# EAGLE board stm32hw05 (EAGLE 6.6.0)
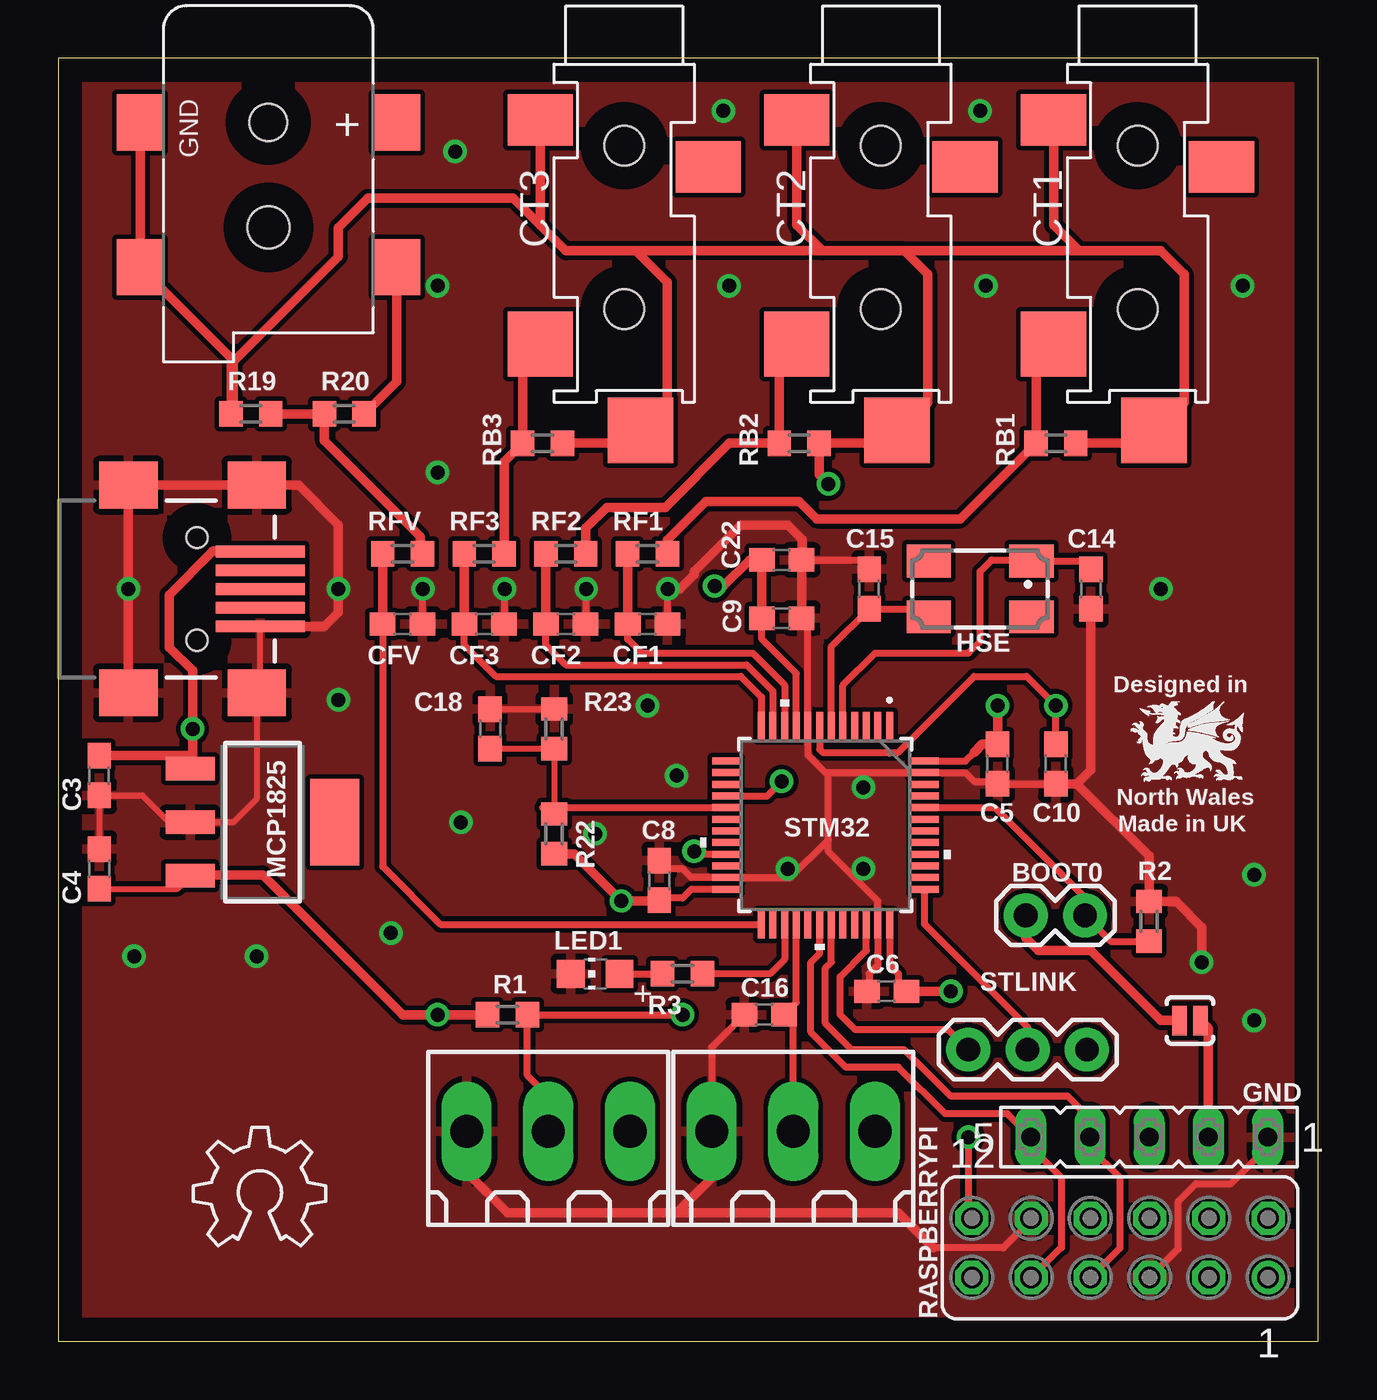
[diagram p0: board, top side]
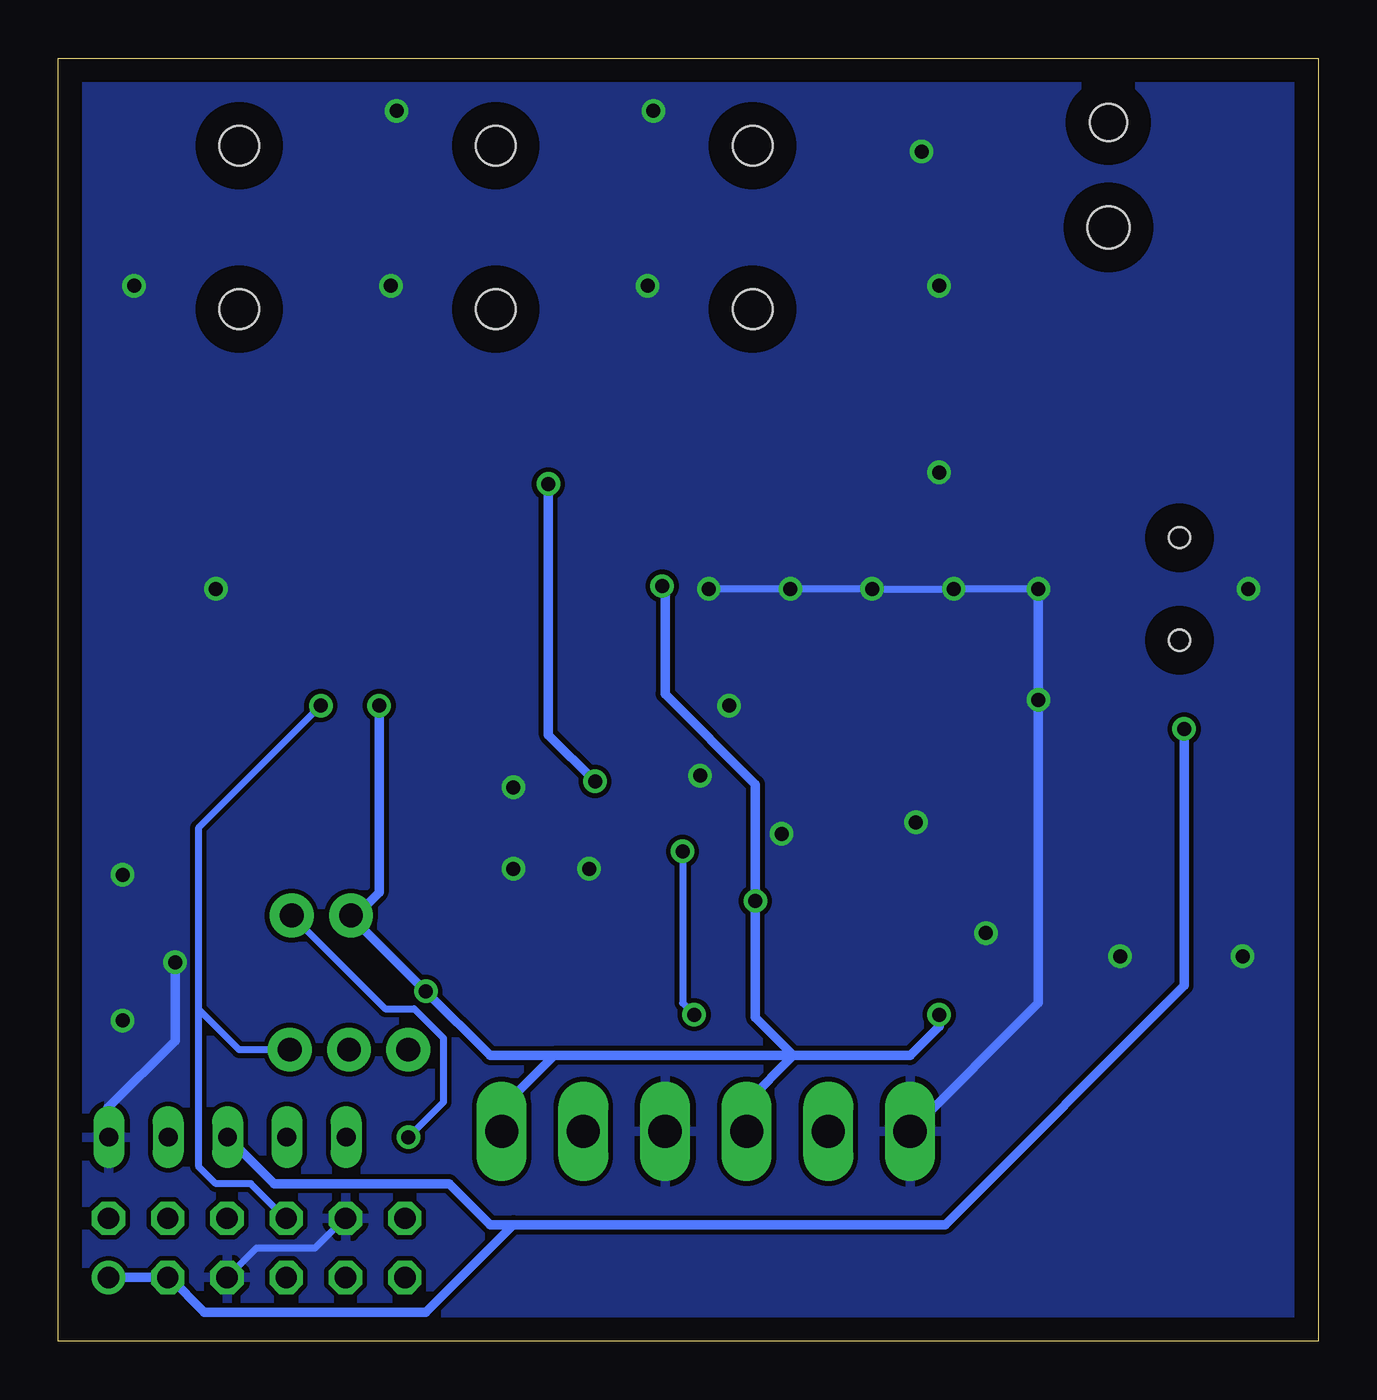
[diagram p1: board, bottom side, seen from below]

Size 54 x 55 mm. Coordinates in mm from the lower left corner, seen from the top.
Outline: 0,0 54,0 54,55 0,55 0,0
Copper layers (1*16): Top 0.035mm / dielectric 1.5mm / Bottom 0.035mm
Design rules "default *": minimum track width 10mil, minimum drill 24mil, track to track 8mil, track to pad 8mil, pad to pad 8mil, via to via 8mil, smd to smd 8mil, copper to edge 40mil, drill to drill 8mil, minimum pad ring 10mil, minimum via ring 8mil, stop-mask expansion 4mil, vias tented up to drill 0.6mm, thermal gap 10mil
Net classes: 0 default: width 0.203 mm, drill 0.6 mm, clearance 0.203 mm; 1 power: width 0.381 mm, drill 0.6 mm, clearance 0.254 mm; 2 gnd: width 0.254 mm, drill 0.6 mm, clearance 0.254 mm

## Footprints (pad centres in the part's own frame; a part is rotated, then mirrored left to right if it is on the bottom)
1X02 = drill 1.016 pad 1.88: 1 0,0; 2 2.54,0
C0603 = smd 1.1 x 1: 1 -0.85,0; 2 0.85,0
STEREO_SMT = smd 2.8 x 2.2: P$1 -3.6,-2.4; P$3 3.6,-4.4 | smd 2.8 x 2.8: P$2 -3.6,-12; P$4 0.7,-15.7 | hole 1.7: 0,-3.5; 0,-10.5
180-3 = drill 1.422 long: 1 -3.5,0; 2 0,0; 3 3.5,0
FE05-1 = drill 0.813 long: 1 -5.08,0; 2 -2.54,0; 3 0,0; 4 2.54,0; 5 5.08,0
CTS406 = smd 1.9 x 1.4: 1 -2.2,-1.2; 2 2.2,-1.2; 3 2.2,1.2; 4 -2.2,1.2
CHIP-LED0805 = smd 1.2 x 1.2: A 0,-1.05; C 0,1.05
SOT-223 = smd 1 x 2.1: 1 -2.3,-3.1; 2 0,-3.1; 3 2.3,-3.1 | smd 3.7 x 2.1: 4 0,3.1
R0603 = smd 1 x 1.1: 1 -0.85,0; 2 0.85,0
FE06-2 = drill 0.914: 1 -6.35,1.27 | drill 0.914 octagon: 2 -6.35,-1.27; 3 -3.81,1.27; 4 -3.81,-1.27; 5 -1.27,1.27; 6 -1.27,-1.27; 7 1.27,1.27; 8 1.27,-1.27; 9 3.81,1.27; 10 3.81,-1.27; 11 6.35,1.27; 12 6.35,-1.27
SJ_2S-NO = smd 0.635 x 1.27: 1 -0.45,0; 2 0.45,0
1X03 = drill 1.016 pad 1.88: 1 0,0; 2 2.54,0; 3 5.08,0
LQFP48-7X7MM = smd 1.194 x 0.305: 1 -4.25,2.75; 2 -4.25,2.25; 3 -4.25,1.75; 4 -4.25,1.25; 5 -4.25,0.75; 6 -4.25,0.25; 7 -4.25,-0.25; 8 -4.25,-0.75; 9 -4.25,-1.25; 10 -4.25,-1.75; 11 -4.25,-2.25; 12 -4.25,-2.75; 25 4.25,-2.75; 26 4.25,-2.25; 27 4.25,-1.75; 28 4.25,-1.25; 29 4.25,-0.75; 30 4.25,-0.25; 31 4.25,0.25; 32 4.25,0.75; 33 4.25,1.25; 34 4.25,1.75; 35 4.25,2.25; 36 4.25,2.75 | smd 0.305 x 1.194: 13 -2.75,-4.25; 14 -2.25,-4.25; 15 -1.75,-4.25; 16 -1.25,-4.25; 17 -0.75,-4.25; 18 -0.25,-4.25; 19 0.25,-4.25; 20 0.75,-4.25; 21 1.25,-4.25; 22 1.75,-4.25; 23 2.25,-4.25; 24 2.75,-4.25; 37 2.75,4.25; 38 2.25,4.25; 39 1.75,4.25; 40 1.25,4.25; 41 0.75,4.25; 42 0.25,4.25; 43 -0.25,4.25; 44 -0.75,4.25; 45 -1.25,4.25; 46 -1.75,4.25; 47 -2.25,4.25; 48 -2.75,4.25
DCJACK_2MM_SMT = smd 2.4 x 2: GND 0,-5.5; GNDBREAK 6.2,-5.5; PWR1 0,5.5; PWR2 6.2,5.5 | hole 1.6: 0,0 | hole 1.8: 4.5,0
USB-MINIB-CISECO = smd 3.8 x 0.5: D+ 7.9,0; D- 7.9,0.8; GND 7.9,-1.6; ID 7.9,-0.8; VBUS 7.9,1.6 | smd 2.5 x 2: MTN1 2.25,4.45; MTN2 7.75,4.45; MTN3 2.25,-4.45; MTN4 7.75,-4.45 | hole 0.9: 5.2,2.2; 5.2,-2.2

## Placement (x,y rotation side)
BOOT0  [1X02]  44,18.25 180 top
C3  4.7uF  [C0603]  1.75,24.25 90 top
C4  4.7uF  [C0603]  1.75,20.25 270 top
C5  100nF  [C0603]  40.25,24.75 90 top
C6  100nF  [C0603]  35.5,15 0 top
C8  100nF  [C0603]  25.75,19.75 270 top
C9  100nF  [C0603]  31,31 180 top
C10  100nF  [C0603]  42.75,24.75 90 top
C14  18pF  [C0603]  44.25,32.25 270 top
C15  18pF  [C0603]  34.75,32.25 90 top
C16  100nF  [C0603]  30.25,14 0 top
C18  10uF  [C0603]  18.5,26.25 270 top
C22  1uF  [C0603]  31,33.5 180 top
CF1  100nF  [C0603]  25.25,30.75 180 top
CF2  100nF  [C0603]  21.75,30.75 180 top
CF3  100nF  [C0603]  18.25,30.75 180 top
CFV  100nF  [C0603]  14.75,30.75 180 top
CT1  STEREO_SMD  [STEREO_SMT]  46.25,54.75 0 top
CT2  STEREO_SMD  [STEREO_SMT]  35.25,54.75 0 top
CT3  STEREO_SMD  [STEREO_SMT]  24.25,54.75 0 top
DS18B20  [180-3]  21,9 0 top
GND  UART  [FE05-1]  46.75,8.75 180 top
HSE  8MHZ  [CTS406]  39.5,32.25 180 top
LED1  Red 1.85V  [CHIP-LED0805]  23,15.75 90 top
LOGO1  OSHW_LOGO_6MILX0200-NT  [OSHW_6X200_NOTEXT]  5.79,4.09 0 top
MCP1825  MCP1825SOT-223-3  [SOT-223]  8.75,22.25 270 top
PULSE  [180-3]  31.5,9 0 top
R1  4.7k  [R0603]  19.25,14 180 top
R2  10k  [R0603]  46.75,18 90 top
R3  1K  [R0603]  26.75,15.75 0 top
R19  10k  [R0603]  8.25,39.75 180 top
R20  120k  [R0603]  12.25,39.75 180 top
R22  10k  [R0603]  21.25,21.75 270 top
R23  10k  [R0603]  21.25,26.25 270 top
RASPBERRYPI  [FE06-2]  45.5,4 180 top
RB1  22r  [R0603]  42.75,38.5 0 top
RB2  22r  [R0603]  31.75,38.5 0 top
RB3  22r  [R0603]  20.75,38.5 0 top
RF1  330R  [R0603]  25.25,33.75 180 top
RF2  330R  [R0603]  21.75,33.75 180 top
RF3  330R  [R0603]  18.25,33.75 180 top
RFV  330R  [R0603]  14.75,33.75 180 top
SJ1  SOLDERJUMPERNO  [SJ_2S-NO]  48.5,13.75 180 top
STLINK  [1X03]  39,12.5 0 top
STM32  STM32F302_303C2  [LQFP48-7X7MM]  32.88,22.12 270 top
U$1  2.1MMJACKSMT  [DCJACK_2MM_SMT]  9,52.25 270 top
U$10  USB-MINIB-5PIN  [USB-MINIB-CISECO]  0.75,32.25 0 top

## Library data of the parts
BOOT0 SJ1 STLINK = SparkFun
C3-C6 C8-C10 C14-C16 C18 C22 CF1-CF3 CFV R1 R2 R19 R20 R22 R23 RB1-RB3 RF1-RF3 RFV = resistor
CT1-CT3 = IotaWatt_parts
DS18B20 PULSE = con-weidmueller-sl35; OC_FARNELL: unknown; OC_NEWARK: unknown
GND RASPBERRYPI = con-lsta; OC_FARNELL: unknown; OC_NEWARK: unknown
HSE = crystal; OC_FARNELL: unknown; OC_NEWARK: unknown
LED1 U$1 = adafruit
LOGO1 = ohw-logo
MCP1825 = SteelCaveRobotics-Power
R3 = rcl
STM32 = stm32f303cb; MANUFACTURER_PART_NUMBER: stm32f302_303c2; VENDOR: STMicroelectronics
U$10 = Ciseco USB miniB_Updated

## Nets
+3V3: BOOT0.2 C4.2 C5.2 C6.2 C8.2 C9.2 C22.2 DS18B20.3 MCP1825.3 PULSE.3 R1.2 R22.2 SJ1.2 STM32.9 STM32.24 STM32.36 STM32.48
+5V: C3.2 GND.3 MCP1825.1 RASPBERRYPI.1 RASPBERRYPI.3 U$10.VBUS
AC: R20.1 U$1.PWR2
ADC0: R19.1 R20.2 RFV.1
BIAS: CT1.P$1 CT1.P$4 CT2.P$1 CT2.P$4 CT3.P$1 CT3.P$4 R19.2 RB1.2 RB2.2 RB3.2 STM32.16 U$1.GND U$1.GNDBREAK
BIAS_IN: C18.2 R22.1 R23.2 STM32.17
BOOT0: BOOT0.1 R2.1 RASPBERRYPI.12 STM32.44
CT1: CF1.2 RF1.2 STM32.10
CT2: CF2.2 RF2.2 STM32.11
CT3: CF3.2 RF3.2 STM32.12
DS18B20: DS18B20.2 R1.1 STM32.21
GND: C3.1 C4.1 C5.1 C6.1 C8.1 C9.1 C10.1 C14.2 C15.2 C16.1 C18.1 C22.1 CF1.1 CF2.1 CF3.1 CFV.1 DS18B20.1 GND.1 LED1.C MCP1825.2 PULSE.1 R2.2 R23.1 RASPBERRYPI.5 RASPBERRYPI.10 STM32.8 STM32.23 STM32.35 STM32.47 U$10.GND U$10.MTN1 U$10.MTN2 U$10.MTN3 U$10.MTN4
HSE_IN: C14.1 HSE.1 STM32.5
HSE_OUT: C15.1 HSE.3 STM32.6
LED: R3.2 STM32.27
LSE_IN: STM32.3
LSE_OUT: STM32.4
N$1: GND.2 SJ1.1
N$2: CT1.P$2 RB1.1 RF1.1
N$8: CT2.P$2 RB2.1 RF2.1
N$10: CT3.P$2 RB3.1 RF3.1
N$41: LED1.A R3.1
NRST: C10.2 RASPBERRYPI.8 STLINK.3 STM32.7
PULSE: C16.2 PULSE.2 STM32.28
SWCLK: STLINK.2 STM32.37
SWDIO: STLINK.1 STM32.34
UART_RX: GND.4 RASPBERRYPI.7 STM32.31
UART_TX: GND.5 RASPBERRYPI.9 STM32.30
VBAT: STM32.1
VSIG: CFV.2 RFV.2 STM32.25

## Tracks (layer width: path | path; a pad name or v marks a point on that pad's centre or on a via)
+3V3  (via drill 0.6)
  Top 0.254: C4.2 5.1,19.4 MCP1825.3
  Top 0.305: STM32.9 31.62,28.62 30.15,30.1 C9.2 | STM32.36 35.62,16.12 36,15.75 36,15.35 C6.2 | STM32.48 38.88,24.88 39.25,25.25 | C5.2 39.88,25.25 40.25,25.61 | STM32.24 27.12,19.38 26.75,19 25.85,19 C8.2
  Top 0.406: MCP1825.3 5.7,20 8.75,20 14.75,14 v16.25,14 R1.2 | C8.2 25.73,18.88 v24.12,18.88 22.1,20.9 R22.2 | v28.12,32.38 28.5,32.38 29.62,33.5 C22.2 C9.2 | 40.25,25.61 v40.25,27.25 | BOOT0.2 41.46,17.29 42,16.75 44.25,16.75 47.25,13.75 SJ1.2 | 39.25,25.25 39.6,25.6 C5.2 | C6.2 36.37,15.02 36.39,15 v38.25,15
  Bottom 0.406: v16.25,14 16.25,13.5 17.5,12.25 22.5,12.25 | 22.5,12.25 24.5,10.25 DS18B20.3 | 22.5,12.25 32.75,12.25 | 32.75,12.25 35,10 PULSE.3 | 22.5,12.25 24.12,13.88 v24.12,18.88 24.12,23.88 28,27.75 28,32.25 v28.12,32.38 | 32.75,12.25 35.5,12.25 v38.25,15 41.46,18.21 BOOT0.2 41.25,18.25 40.25,19.25 v40.25,27.25
+5V  (via drill 0.6)
  Top 0.406: U$10.VBUS 8.62,33.88 6.62,33.88 4.75,32 4.75,29.75 5.75,28.75 v5.75,26.25 5.75,25.25 | MCP1825.1 5.75,24.65 5.75,25.25 | C3.2 5.6,25.1 5.75,25.25
  Bottom 0.406: 46.75,7.75 GND.3 44.75,6.75 37.25,6.75 35.5,5 34.5,5 | 34.5,5 16,5 5.75,15.25 v5.75,26.25 | RASPBERRYPI.1 RASPBERRYPI.3 49.23,2.73 47.75,1.25 38.25,1.25 34.5,5
AC
  Top 0.406: R20.1 14.5,41.15 U$1.PWR2
ADC0
  Top 0.406: R19.1 R20.2 11.4,38.6 15.5,34.5 15.5,33.6 RFV.1
BIAS  (via drill 0.6)
  Top 0.305: STM32.16 30.38,23.38 v31,24
  Top 0.406: 30.75,53.25 CT2.P$1 | CT2.P$1 32.55,53.25 | CT2.P$4 37.1,37.9 37.1,40.1 37.25,40.25 | 36.25,46.75 43.75,46.75 | 43.75,46.75 47.25,46.75 48.25,45.75 48.25,40.35 CT1.P$4 47.05,39.05 | 47.05,39.05 46.5,38.5 RB1.2 | 36.25,46.75 37.25,45.75 37.25,40.35 CT2.P$4 | 36.25,46.75 32.75,46.75 | 32.75,46.75 24.75,46.75 | 24.75,46.75 21.75,46.75 20.65,47.85 | 24.75,46.75 26.1,45.4 26.1,40.2 arc-90 CT3.P$4 24.4,38.5 RB3.2 | 32.75,46.75 31.65,47.85 CT2.P$1 | 43.75,46.75 42.65,47.85 CT1.P$1 | CT2.P$4 35.4,38.5 RB2.2 32.6,37.15 v33,36.75 | 20.65,47.85 CT3.P$1 | 48.25,40.25 47.05,39.05 | U$1.GND U$1.GNDBREAK 7.4,42.15 R19.2 7.5,39.85 7.5,42 12,46.5 12,47.75 13.25,49 19.5,49 20.65,47.85
  Bottom 0.406: v31,24 33,26 v33,36.75
BIAS_IN
  Top 0.254: C18.2 R23.2 R22.1
  Top 0.305: STM32.17 20.75,22.88 R22.1
BOOT0  (via drill 0.6)
  Top 0.305: STM32.44 40.12,22.88 44,19 BOOT0.1 45.1,17.15 R2.1 | v39,8.75 39,5.42 RASPBERRYPI.12
  Bottom 0.305: BOOT0.1 40,14.25 38.75,14.25 37.5,13 37.5,10.25 v39,8.75
CT1
  Top 0.305: CF1.2 24.4,30.1 25,29.5 29.75,29.5 31.12,28.12 STM32.10
  Top 0.406: RF1.2 CF1.2
CT2
  Top 0.305: CF2.2 20.9,29.85 21.75,29 29.5,29 30.62,27.88 STM32.11
  Top 0.406: RF2.2 CF2.2
CT3
  Top 0.305: CF3.2 17.4,29.85 18.75,28.5 29.25,28.5 30.12,27.62 STM32.12
  Top 0.406: RF3.2 CF3.2
DS18B20  (via drill 0.6)
  Top 0.305: DS18B20.2 21,10.5 20.1,11.4 R1.1 v26.75,14 | STM32.21 27.38,20.88 v27.25,21
  Bottom 0.305: v27.25,21 27.25,14.5 v26.75,14
GND  (via drill 0.6)
  Top 0.254: C18.1 R23.1 | C4.1 C3.1 3.6,23.4 4.75,22.25 MCP1825.2 7.5,22.25 8.5,23.25 U$10.MTN4 8.65,27.95 U$10.GND
  Top 0.305: C9.1 32.12,30.73 STM32.8 32.12,25.12 32.88,24.38 33,24.38 | C22.1 34.35,33.5 C15.2 | C6.1 34.75,15.1 34.75,15.75 35.12,16.12 STM32.35 35.12,18.88 33,21 33,21.5 | C10.1 C5.1 40.02,24 39.25,24 38.88,24.38 STM32.47 33,24.38 | C8.1 26.1,20.25 26.75,20.25 27.12,19.88 STM32.23 31.38,19.88 33,21.5 | 33,21.5 33,24.38 | RASPBERRYPI.5 48,3.96 48,6 48.75,6.75 50.25,6.75 51.83,8.33 | PULSE.1 28,12.6 C16.1 | 41.69,5.31 41.69,5.19 40.5,4 37.5,4 | CF1.1 26.12,30.77 v26.12,32.25 | CF2.1 22.62,30.77 v22.62,32.25 | CFV.1 15.62,30.77 v15.62,32.25 | CF3.1 19.12,30.77 v19.12,32.25
  Top 0.406: C14.2 44.25,24.5 43.65,23.9 | 43.65,23.9 C10.1 | U$10.GND 11.4,30.65 12,31.25 v12,32.25 12,35 10.3,36.7 U$10.MTN2 U$10.MTN1 v3,32.25 U$10.MTN3 | 43.65,23.9 46.75,20.8 R2.2 47.9,18.85 49,17.75 v49,16.25 | 26.5,5.5 19.25,5.5 17.5,7.25 DS18B20.1 | 26.5,5.5 36,5.5 37.5,4 | 41.69,5.31 RASPBERRYPI.10 | PULSE.1 28,7 26.5,5.5 | v26.12,32.25 26.62,32.25 27.25,32.88 27.25,33 29.25,35 31.25,35 31.88,34.38 31.88,33.52 C22.1 C9.1
  Bottom 0.305: v12,32.25 v15.62,32.25 v19.12,32.25 v22.62,32.25 v26.12,32.25 | RASPBERRYPI.5 45.5,4 43,4 41.73,5.27 RASPBERRYPI.10
  Bottom 0.406: GND.1 51.88,8.79 51.88,10 49,12.88 v49,16.25 | DS18B20.1 12,14.5 v12,32.25
  other vias: 47.25,32.25 17.25,22.25 34.5,20.25 25.25,27.25 26.5,24.25 14.25,17.5 51.25,20 16.25,37.25 16.25,45.25 17,51 28.75,45.25 39.75,45.25 50.75,45.25 28.5,52.75 39.5,52.75 8.5,16.5 12,27.5 3.25,16.5 34.5,23.75 31.25,20.25 51.25,13.75 23,21.75
  pour Top: 0.25,54.75 53.75,54.75 53.75,0.25 0.25,0.25
  pour Bottom: 0.25,54.75 0.25,0.25 53.75,0.25 53.75,54.75
HSE_IN
  Top 0.305: STM32.5 33.62,28.12 35,29.5 39,29.5 39.5,30 39.5,33 40,33.5 41.65,33.5 HSE.1 43.9,33.45 C14.1
HSE_OUT
  Top 0.305: STM32.6 33.12,29.77 C15.1 36.95,31.4 HSE.3
LED
  Top 0.305: STM32.27 31.12,16.38 30.5,15.75 R3.2
N$1
  Top 0.406: GND.2 49.29,13.41 SJ1.1
N$2
  Top 0.406: CT1.P$2 41.9,42 RB1.1 38.65,35.25 32.5,35.25 31.75,36 27.75,36 26.1,34.35 RF1.1
N$8
  Top 0.406: CT2.P$2 30.9,42 RB2.1 28.75,38.5 26,35.75 23.5,35.75 22.6,34.85 RF2.1
N$10
  Top 0.406: RF3.1 19.1,37.7 RB3.1 19.9,42 CT3.P$2
N$41
  Top 0.305: LED1.A R3.1
NRST  (via drill 0.6)
  Top 0.305: STM32.7 32.62,25.38 32.75,25.25 36,25.25 39.25,28.5 41.5,28.5 v42.75,27.25 C10.2 42.65,25.6
  Bottom 0.305: RASPBERRYPI.8 44.27,5.27 45.75,6.75 47.25,6.75 48,7.5 48,14.25 | v42.75,27.25 48,22 48,14.25 | STLINK.3 46.25,12.5 48,14.25
PULSE
  Top 0.305: 31.5,13.9 C16.2 | PULSE.2 31.5,13.6 C16.2 | C16.2 31.62,14.53 STM32.28
SWCLK
  Top 0.305: STM32.37 37.12,17.88 41.54,13.46 STLINK.2
SWDIO
  Top 0.305: STM32.34 34.62,16.75 33.5,15.62 33.5,14 34.12,13.38 38.12,13.38 STLINK.1
UART_RX
  Top 0.305: RASPBERRYPI.7 45.5,4 45.5,7 44.21,8.29 GND.4 44.25,8.79 44.25,9.5 43.25,10.5 38.25,10.5 36.25,12.5 34,12.5 32.88,13.62 32.88,16 33.12,16.25 STM32.31
UART_TX
  Top 0.305: RASPBERRYPI.9 42.96,4 43,4 43,7 41.67,8.33 GND.5 40.67,9.75 38,9.75 36,11.75 33.75,11.75 32.25,13.25 32.25,16.25 32.62,16.62 STM32.30
VSIG
  Top 0.305: CFV.2 13.9,20.35 16.38,17.88 STM32.25
  Top 0.406: RFV.2 CFV.2

## Text on the board
tPlace: Designed in | North Wales | Made in UK
tValues: DIO | CLK | RST | emonSTM32 | v0.1 | Development Board | OpenEnergyMonitor | TX | RX | 5V | 3.3 | GND | T | 3V3 | GND | P | 3V3 | Open-Hardware | DS18B20 | PULSE INPUT